# Altium PCB PCB_STC8方案测试板_2022-01-08.pcbdoc
Units mm, origin at the board's own origin, x right, y up, seen from the top; angles counter-clockwise.
Board outline 98 x 98 mm, 2 copper layers (Top Layer, Bottom Layer); 66 components, 57 nets, 261 pads, 56 vias.
Unrouted connection lines stored in the file: 1.
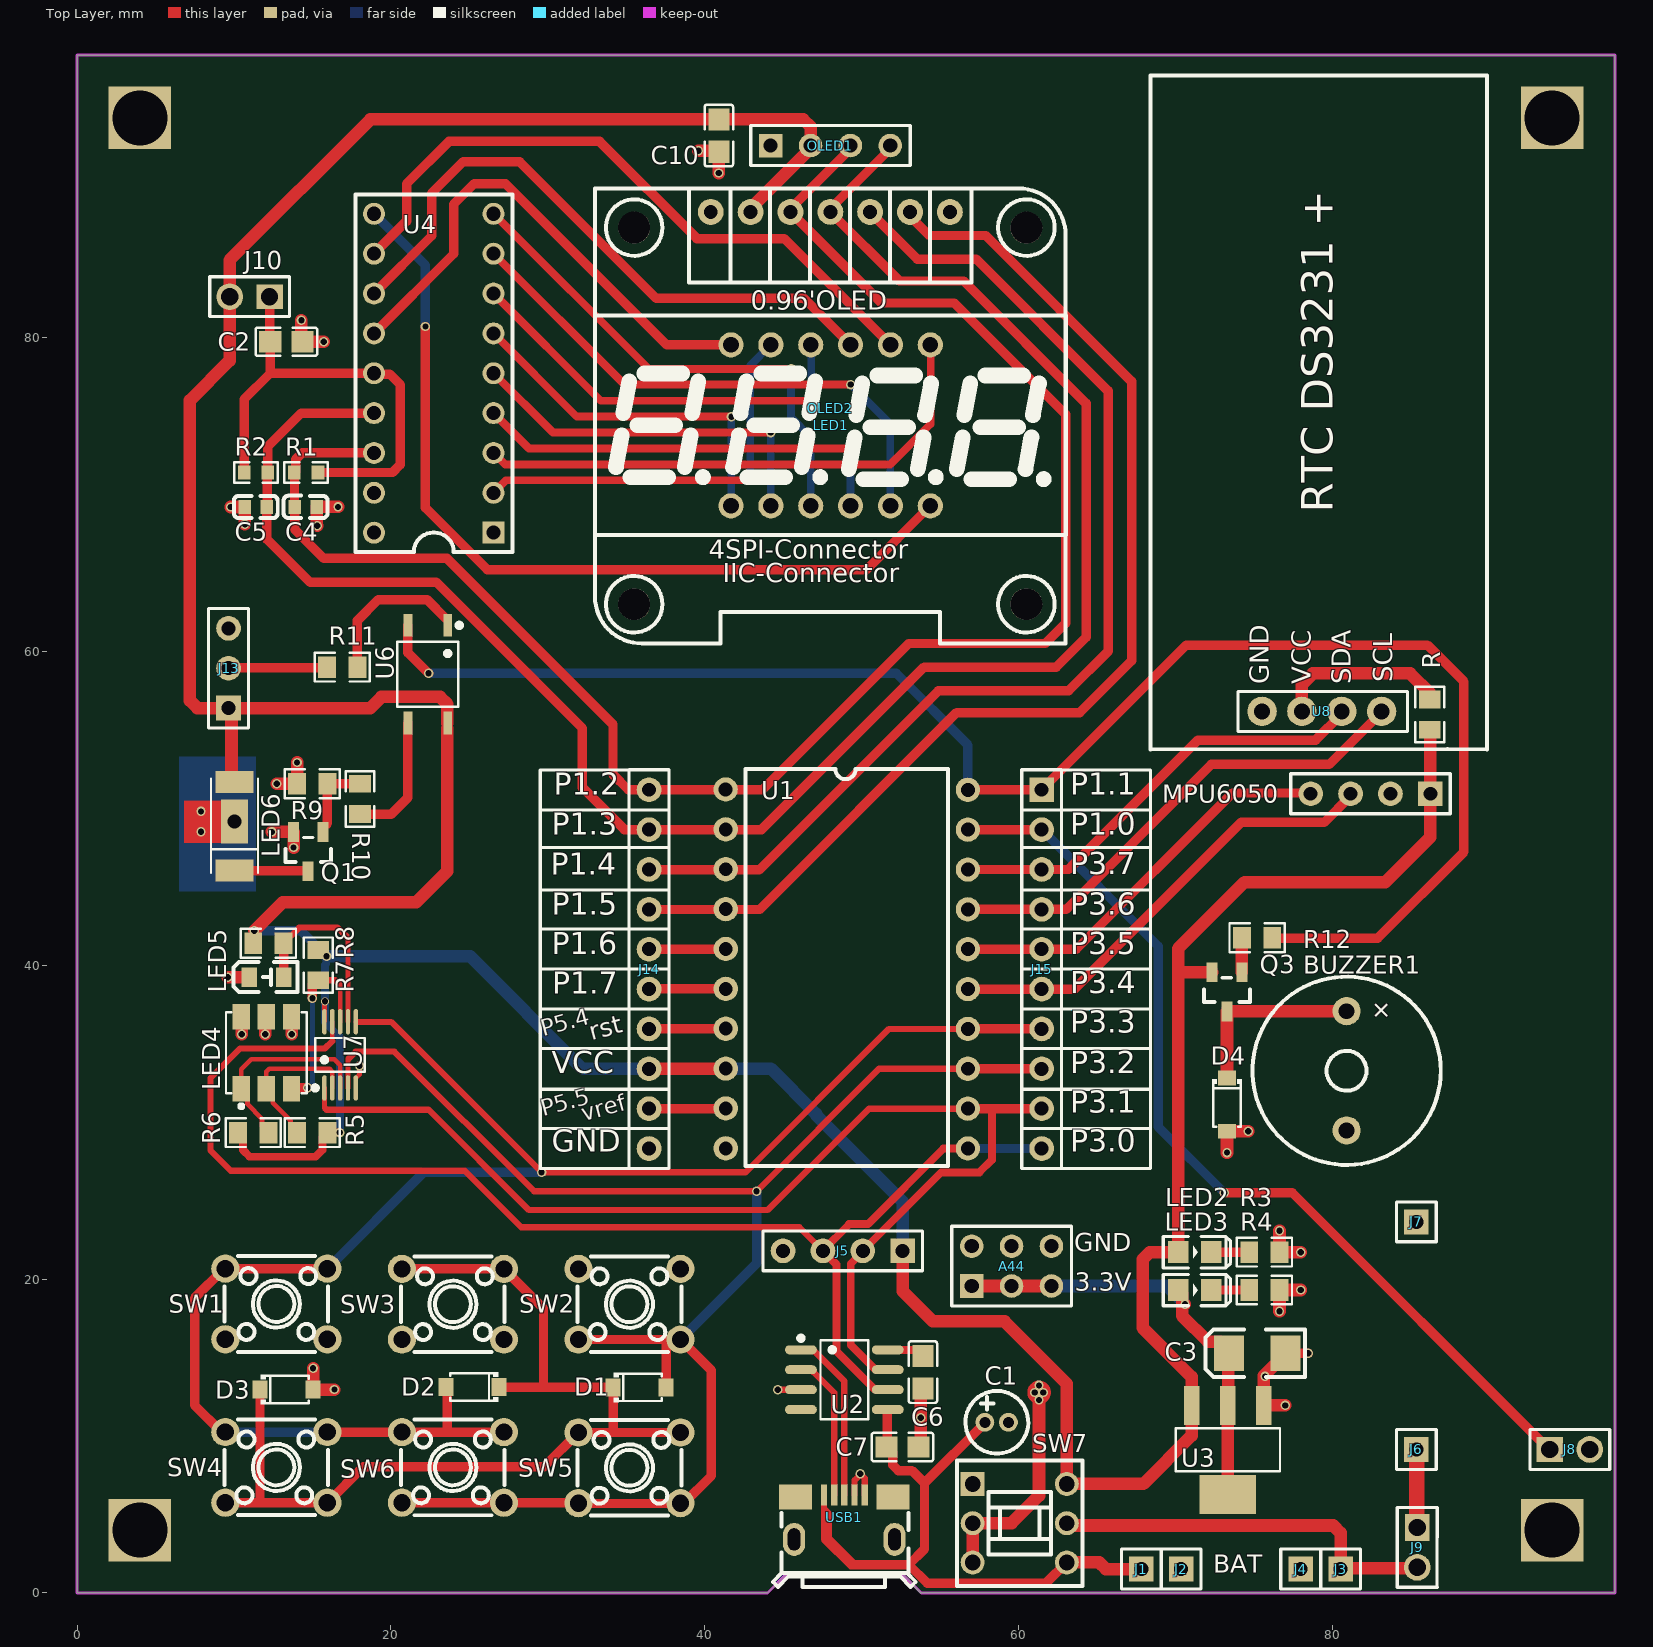
[diagram p0: Top Layer view]
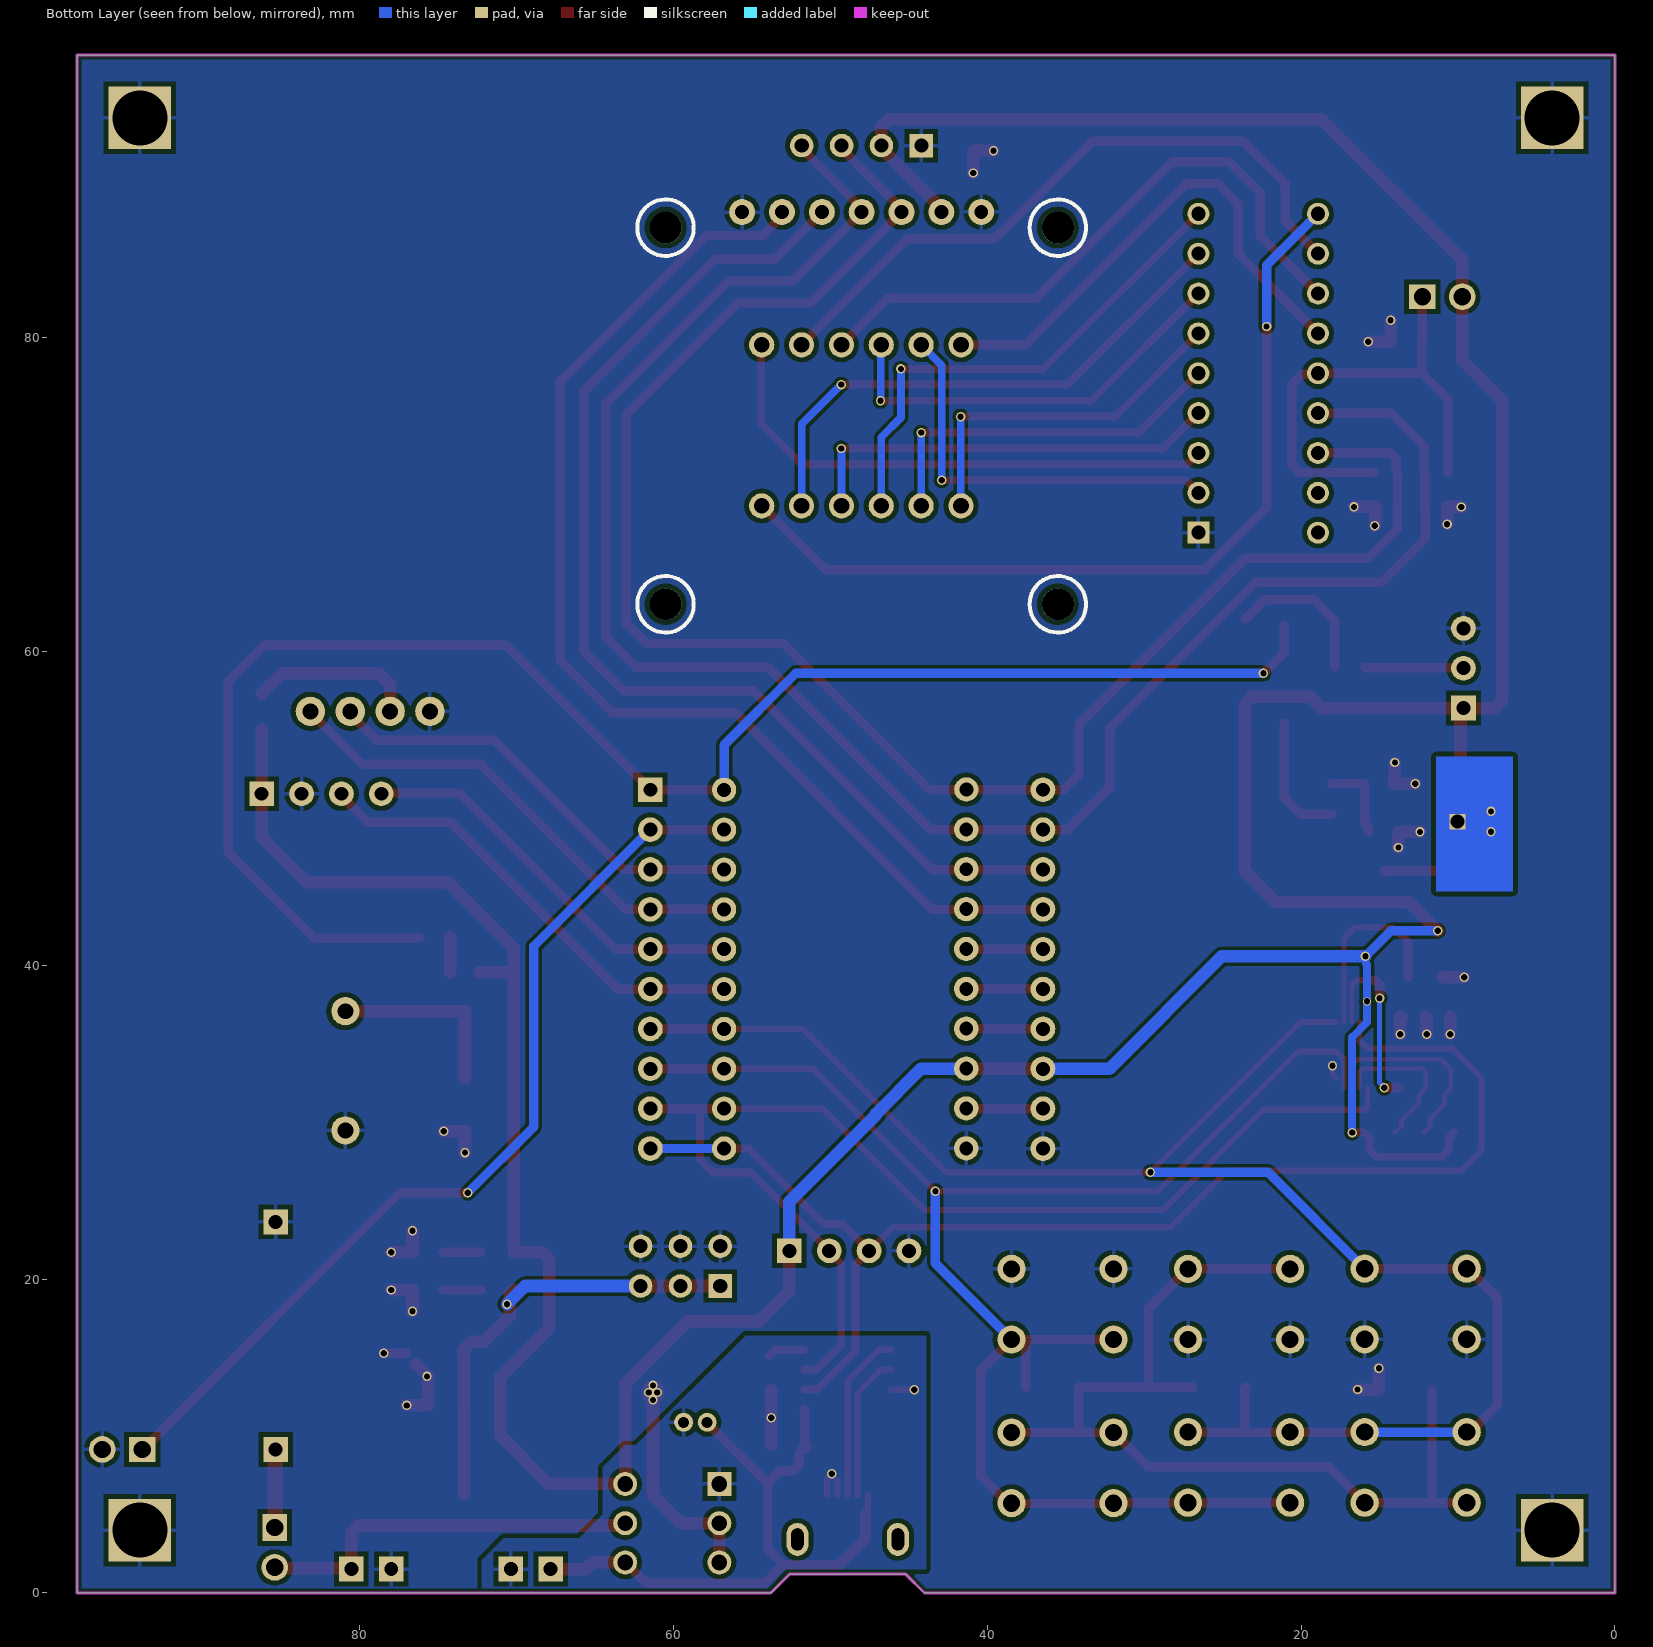
[diagram p1: Bottom Layer view, seen from below]

## Layer stack, top to bottom
Top Solder: solder mask 0.0102, Solder Resist, Dk 3.5
Top Layer: signal copper 0.0356
Dielectric1: dielectric 0.32, FR-4, Dk 4.8
Bottom Layer: signal copper 0.0356
Bottom Solder: solder mask 0.0102, Solder Resist, Dk 3.5

## Board outline
0,0 0,98 98,98 98,0 53.8,0 52.6,1.2 45.2,1.2 44,0

## Design rules (kind name [scope] priority, off if disabled: settings)
AssemblyTestPointUsage [All] p1 off:
AssemblyTestpoint [All] p1 off: testpointundercomponent=TRUE minsize=1.016 maxsize=2.54 preferedsize=1.524 minholesize=0 maxholesize=1.016 preferedholesize=0.813 testpointgrid=0.025 usegrid=TRUE gridtolerance=0 allowsidetop=TRUE allowsidebottom=TRUE
Clearance Clearance_1 [All] p1: gap=0.2 ignorepadtopadclearanceinfootprint=TRUE except(0.3: THPad-THPad THPad-Via THPad-Fill THPad-Poly THPad-Region THPad-Text THPad-Hole Fill-Fill Fill-Poly Fill-Region Fill-Text Fill-Hole Poly-Poly Poly-Region Poly-Text Poly-Hole Region-Region Region-Text Region-Hole)
ComponentClearance [All] p1 off: gap=0.254 collisioncheckmode=3 verticalgap=0.254 showdistances=FALSE
DiffPairsRouting [All] p1 off: maxlimit=0.254 minlimit=0.254 mostfreqgap=0.254 toplayer_minwidth=0.381 toplayer_maxwidth=0.381 toplayer_prefwidth=0.381 bottomlayer_minwidth=0.381 bottomlayer_maxwidth=0.381 bottomlayer_prefwidth=0.381 maxuncoupledlength=12.7
FabricationTestPointUsage [All] p1 off: valid=0 allowmultiple=FALSE
FabricationTestpoint [All] p1 off: side=3 testpointundercomponent=TRUE minsize=1.016 maxsize=2.54 preferedsize=1.524 minholesize=0 maxholesize=1.016 preferedholesize=0.813 testpointgrid=0.025 allowsidetop=TRUE allowsidebottom=TRUE usegrid=TRUE gridtolerance=0
FanoutControl Fanout_BGA [IsBGA] p1 off: bgadir=Out bgaviamode=Centered fanoutstyle=Auto fanoutdirection=Alternating viagrid=0.025 // Fanout_BGA (Default Rule)
FanoutControl Fanout_LCC [IsLCC] p2 off: bgadir=Out bgaviamode=Centered fanoutstyle=Auto fanoutdirection=Alternating viagrid=0.025 // Fanout_LCC (Default Rule)
FanoutControl Fanout_SOIC [IsSOIC] p3 off: bgadir=Out bgaviamode=Centered fanoutstyle=Auto fanoutdirection=Alternating viagrid=0.025 // Fanout_SOIC (Default Rule)
FanoutControl Fanout_Small [(CompPinCount < 5)] p4 off: bgadir=Out bgaviamode=Centered fanoutstyle=Auto fanoutdirection=OutThenIn viagrid=0.025 // Fanout_Small (Default Rule)
FanoutControl Fanout_Default [All] p5 off: bgadir=Out bgaviamode=Centered fanoutstyle=Auto fanoutdirection=Alternating viagrid=0.025 // Fanout_Default (Default Rule)
Height [All] p1 off: minheight=0 maxheight=25.4 prefheight=12.7
HoleSize [All] p1 off: absolutevalues=TRUE maxlimit=2.54 minlimit=0.025 maxpercent=80.000 minpercent=20.000
HoleToHoleClearance [All] p1 off: gap=0.254 allowstackedmicrovias=TRUE
LayerPairs [All] p1 off: enforce=TRUE
MinimumSolderMaskSliver [All] p1 off: minsoldermaskwidth=0.254
NetAntennae [All] p1 off: netantennaetolerance=0
PasteMaskExpansion [All] p1 off: expansion=0
PlaneClearance [All] p1 off: clearance=0.508
PlaneConnect [All] p1 off: planeconnectstyle=Relief reliefexpansion=0.508 reliefentries=4 reliefconductorwidth=0.254 reliefairgap=0.254
PolygonConnect [All] p1: thpad.connectstyle=Relief thpad.reliefconductorwidth=0.254 thpad.reliefentries=4 thpad.polygonreliefangle="90 Angle" thpad.airgapwidth=0.3 smdpad.connectstyle=Relief smdpad.reliefconductorwidth=0.254 smdpad.reliefentries=4 smdpad.polygonreliefangle="90 Angle" smdpad.airgapwidth=0.3 via.connectstyle=Direct via.reliefconductorwidth=0.254 via.reliefentries=4 via.polygonreliefangle="90 Angle" via.airgapwidth=0.3
RoutingCorners [All] p1 off: cornerstyle=45-Degree minsetback=2.54 maxsetback=2.54
RoutingLayers [All] p1 off: top layer_v5=TRUE bottom layer_v5=TRUE
RoutingPriority [All] p1 off: routingpriority=0
RoutingTopology [All] p1 off: topology=Shortest
RoutingVias [All] p1: holewidth=0.4 width=0.6 viastyle="Through Hole" minholewidth=0.4 minwidth=0.6 maxholewidth=0.4 maxwidth=0.6
ShortCircuit [All] p1 off: allowed=FALSE
SilkToSilkClearance [All] p1 off: silktosilkclearance=0.254
SilkToSolderMaskClearance [IsPad] p1 off: minsilkscreentomaskgap=0.254 clearancetoexposedcopper=TRUE
SolderMaskExpansion [All] p1 off: expansion=0.102 istentingtop=FALSE
UnRoutedNet [All] p1 off:
UnpouredPolygon [All] p1 off:
Width [All] p1: maxlimit=2.54 minlimit=2539.975 preferedwidth=0.508 toplayer_minwidth=0 bottomlayer_minwidth=0 minimp=50.000000 maximp=50.000000 favimp=50.000000
1 further rules are at their usual default settings.

## Components (designator, comment, footprint, x,y, rotation, side; value= is the part's Value field where it differs from the comment)
A44 "Comment" HDR2X3 57.01,19.56 r0 top
BUZZER1 "TMB12A05" BUZ-TH_BD12.0-P7.60-D0.6-FD 80.899,33.274 r270 top
C1 "10u" ?#1 58.6,10.875 r0 top
C2 "104" C0805 13.34,79.73 r180 top
C3 "10uF" "CD B(3528)" 75.2,15.275 r0 top
C4 "101" C0603 14.57,69.204 r0 top
C5 "101" C0603 11.4,69.2 r0 top
C6 "104" C0805 53.9,14.07 r270 top
C7 "104" C0805 52.6,9.3 r180 top
C10 "0.1u" C0805 40.9,92.87 r90 top
D1 "1N4148W-T4" SOD-123_L2.8-W1.8-LS3.7-RD 35.85,13.1 r0 top
D2 "1N4148W-T4" SOD-123_L2.8-W1.8-LS3.7-RD 25.2,13.125 r180 top
D3 "1N4148W-T4" SOD-123_L2.8-W1.8-LS3.7-RD 13.35,12.963 r0 top
D4 "1N4148W-T4" SOD-123_L2.8-W1.8-LS3.7-RD 73.279,31.115 r270 top
J1 "充电+" HDR-M-2.54_1X1 67.818,1.524 r270 top
J2 "充电-" HDR-M-2.54_1X1 70.358,1.524 r270 top
J3 "锂电池供电+" HDR-M-2.54_1X1 80.518,1.524 r270 top
J4 "锂电池供电-" HDR-M-2.54_1X1 77.978,1.524 r270 top
J5 "HDR-M-2.54_1x4" HDR-M-2.54_1X4 48.8,21.8 r180 top
J6 "led驱动+" HDR-M-2.54_1X1 85.344,9.144 r90 top
J7 "led驱动-" HDR-M-2.54_1X1 85.344,23.644 r90 top
J8 "PWM输入" HDR-M-2.54_1X2 95.123,9.144 r0 top
J9 "led驱动+" HDR-M-2.54_1X2 85.4,2.9 r270 top
J10 "HDR-M-2.54_1x2" HDR-M-2.54_1X2 11,82.6 r180 top
J13 "HDR-M-2.54_1x3" HDR-M-2.54_1X3 9.652,58.928 r90 top
J14 "HDR-M-2.54_1x10" HDR-M-2.54_1X10#1 36.449,39.751 r270 top
J15 "HDR-M-2.54_1x10" HDR-M-2.54_1X10#2 61.468,39.751 r270 top
LED1 "SR410361N" LED-SEG-TH_12P-L30.0-W14.0-P2.54-S10.26-BL 48.022,74.404 r0 top
LED2 "LED-0805_G" LED0805_GREEN 71.213,21.717 r0 top
LED3 "LED-0805_G" LED0805_GREEN 71.213,19.304 r0 top
LED4 "5050-RGB" LED-ARRAY-SMD_6P-L5.4-W5.0-TL-FD 12.065,34.417 r90 top
LED5 "0805Y" LED0805-RD_YELLOW 12.065,39.243 r0 top
LED6 "HL-A-5730D34W_C210350" LED-SMD_3P-L5.7-W3.0-RD 10.033,48.849 r90 top
MPU6050 "MCU6050" HDR-M-2.54_1X4 82.423,50.927 r180 top (schematic designator J12)
OLED1 "0.96OLED_4P" HDR1X4 44.2,92.234 r0 top
OLED2 "0.96OLED_7P" 0.96OLED_7P 48,88 r0 top
Q1 "s8050" SOT-23-3_L2.9-W1.3-P1.90-LS2.4-TR 14.732,47.244 r90 top
Q3 "s8550" SOT-23-3_L2.9-W1.6-P1.90-LS2.8-TR-CW 73.275,38.3 r90 top
R "2k" R0805 86.2,55.975 r270 top (schematic designator R12)
R1 "10k" R0603 14.6,71.4 r0 top
R2 "10k" R0603 11.4,71.4 r180 top
R3 "1k" R0805 75.658,21.717 r0 top
R4 "680" R0805 75.658,19.304 r0 top
R5 "1k" R0805 14.986,29.337 r180 top
R6 "1k" R0805 11.226,29.337 r180 top
R7 "1k" R0805 15.367,40.005 r90 top
R8 "1k" R0805 12.192,41.402 r180 top
R9 "47k" R0805 14.986,51.562 r0 top
R10 "4k7" R0805 18.034,50.596 r90 top
R11 "1k" R0805 16.9,59 r180 top
R12 "2k" R0805 75.2,41.75 r180 top
SW1 "K2-1102DP-C4SW-04" KEY-TH_4P-L6.0-W6.0-P4.50-LS6.5 12.7,18.415 r180 top
SW2 "K2-1102DP-C4SW-04" KEY-TH_4P-L6.0-W6.0-P4.50-LS6.5 35.201,18.4 r0 top
SW3 "K2-1102DP-C4SW-04" KEY-TH_4P-L6.0-W6.0-P4.50-LS6.5 23.951,18.4 r180 top
SW4 "K2-1102DP-C4SW-04" KEY-TH_4P-L6.0-W6.0-P4.50-LS6.5 12.7,8.001 r0 top
SW5 "K2-1102DP-C4SW-04" KEY-TH_4P-L6.0-W6.0-P4.50-LS6.5 35.201,7.975 r180 top
SW6 "K2-1102DP-C4SW-04" KEY-TH_4P-L6.0-W6.0-P4.50-LS6.5 23.951,8 r0 top
SW7 "电源开关" SW-TH_6P-L8.0-W8.0-P2.50 60.071,4.445 r270 top
U1 "STC8G1K17-38I-TSSOP20" DIP-20-wide 41.332,51.199 r0 top
U2 "CH340N" SOP-8_L5.0-W4.0-P1.27-LS6.0-BL 48.895,13.589 r270 top
U3 "AMS1117-3.3" SOT-223-4_L6.5-W3.5-P2.30-LS7.0-BR 73.331,9.117 r90 top
U4 "TM1636" DIP18-2.54-22.8X7.62MM 22.733,77.724 r90 top
U6 "TLP184(GB-TPL,SE(T" SOP-4_L3.7-W4.6-P2.54-LS7.0-BR 22.352,58.547 r90 top
U7 "CH442E" MSOP-10_L3.0-W3.0-P0.50-LS5.0-BL 16.764,34.29 r0 top
U8 "DS3231模块" ?#2 78.812,73.955 r90 top (schematic designator U5)
USB1 "U254-051T-4BH82-S2S" MICRO-USB-SMD_U254-051T-4BH82-S2S 48.895,4.826 r0 top

## Footprints (in the part's own frame and the unit in brackets; to place one, negate y for a bottom-side part, rotate by r counter-clockwise, add the part's x,y. Pads: shape width x height; smd on the part's side, far side on the other; paste and mask are expansions set on the pad)
0.96OLED_7P [mm]
  round 1.65 hole 0.89: 1(-7.619,0.001) 2(-5.079,-0.004) 3(-2.539,-0.004) 4(0.001,0.004) 5(2.539,-0.001) 6(5.079,-0.001) 7(7.619,-0.004)
  round 2.032 hole 2.032 unplated: ""(-12.501,-24.997) ""(-12.501,-0.997) ""(12.498,-24.997) ""(12.498,-0.997)
  silkscreen extent -15,-27.5 15,1.5
BUZ-TH_BD12.0-P7.60-D0.6-FD [mm]
  round 1.8 hole 1: 1(-3.8,0) 2(3.8,0)
  silkscreen extent -6,-6 6,6
C0603 [mm]
  rect 0.8x0.9 smd: 1(-0.7,0) 2(0.7,0)
  silkscreen extent -1.41,-0.71 1.39,0.72
C0805 [mm]
  rect 1.41x1.35 smd: 1(-1.03,0) 2(1.03,0)
  silkscreen extent -1.96,-0.9 1.96,0.9
"CD B(3528)" [mil] "长3.5mm，宽2.8mm，厚1.9mm"
  rect 75x90 smd: 1(-70.87,-0.01) 2(70.86,-0.01)
  silkscreen extent -130,-60 120,60, body extent -69,-55 69,55, height 75
DIP18-2.54-22.8X7.62MM [mm]
  rect 1.4x1.4 hole 0.899: 1(-10.16,-3.81)
  round 1.4 hole 0.899: 2(-7.62,-3.81) 3(-5.08,-3.81) 4(-2.54,-3.81) 5(0,-3.81) 6(2.54,-3.81) 7(5.08,-3.81) 8(7.62,-3.81) 9(10.16,-3.81) 10(10.16,3.81) 11(7.62,3.81) 12(5.08,3.81) 13(2.54,3.81) 14(0,3.81) 15(-2.54,3.81) 16(-5.08,3.81) 17(-7.62,3.81) 18(-10.16,3.81)
  silkscreen extent -11.38,-5 11.38,5
DIP-20-wide [mil] "STC8G1K17-38I-TSSOP20"
  round 61 hole 35: 1(0,0) 2(0.25,-100.02) 3(0.25,-200.04) 4(0.25,-300.06) 5(0.25,-400.08) 6(0.25,-500.1) 7(0.25,-600.12) 8(0.25,-700.14) 9(0.25,-800.16) 10(0.25,-900.18) 11(607.75,-900.59) 12(607.75,-800.62) 13(607.75,-700.64) 14(607.75,-600.66) 15(607.75,-500.68) 16(607.75,-400.7) 17(607.75,-300.73) 18(607.75,-200.75) 19(607.75,-100.77) 20(607.75,-0.79)
  silkscreen extent 50,-945 558,51
HDR1X4 [mm] "Connector; Header; 4 Position"
  rect 1.5x1.5 hole 0.9: 1(0,0)
  round 1.5 hole 0.9: 2(2.54,0) 3(5.08,0) 4(7.62,0)
  silkscreen extent -1.27,-1.27 8.89,1.27
HDR2X3 [mm] "Connector; Header; 3x2 Position"
  rect 1.5x1.5 hole 0.9: 1(0,0)
  round 1.5 hole 0.9: 2(0,2.54) 3(2.54,0) 4(2.54,2.54) 5(5.08,0) 6(5.08,2.54)
  silkscreen extent -1.27,-1.27 6.35,3.81, body extent -1.27,-1.27 6.35,3.81, height 8.54
HDR-M-2.54_1X1 [mil]
  rect 62x62 hole 35: 1(0,0)
  silkscreen extent -50,-50 50,50
HDR-M-2.54_1X2 [mm]
  rect 1.7x1.575 hole 1.1: 1(-1.27,0)
  round 1.7 hole 1.1: 2(1.27,0)
  silkscreen extent -2.54,-1.27 2.54,1.27
HDR-M-2.54_1X3 [mil]
  rect 62x62 hole 35: 1(-100,0)
  round 62 hole 35: 2(0,0) 3(100,0)
  silkscreen extent -150,-50 150,50
HDR-M-2.54_1X4 [mil]
  rect 62x62 hole 35: 1(-150,0)
  round 62 hole 35: 2(-50,0) 3(50,0) 4(150,0)
  silkscreen extent -200,-50 200,50
HDR-M-2.54_1X10#1 [mil]
  round 62 hole 35: 1(-450,0) 2(-350,0) 3(-250,0) 4(-150,0) 5(-50,0) 6(50,0) 7(150,0) 8(250,0) 9(350,0) 10(450,0)
  silkscreen extent -500,-50 500,50
HDR-M-2.54_1X10#2 [mil]
  rect 62x62 hole 35: 1(-450,0)
  round 62 hole 35: 2(-350,0) 3(-250,0) 4(-150,0) 5(-50,0) 6(50,0) 7(150,0) 8(250,0) 9(350,0) 10(450,0)
  silkscreen extent -500,-50 500,50
KEY-TH_4P-L6.0-W6.0-P4.50-LS6.5 [mm]
  round 1.8 hole 1.1: 1(-3.251,-2.25) 2(3.251,-2.25) 3(3.251,2.25) 4(-3.251,2.25)
  silkscreen extent -3.3,-3.05 3.3,3.05
LED0805-RD_YELLOW [mm]
  rect 1x1.25 smd: 1(-1.1,0) 2(1.1,0)
  silkscreen extent -2.1,-0.95 1.98,0.96
LED0805_GREEN [mm]
  rect 1.3x1.4 smd: 1(-1.05,0) 2(1.05,0)
  silkscreen extent -2,-1 2.3,1
LED-ARRAY-SMD_6P-L5.4-W5.0-TL-FD [mm]
  rect 1.625x1.1 smd: 1(-2.287,1.6) 2(-2.287,0) 3(-2.287,-1.6) 4(2.287,-1.6) 5(2.287,0) 6(2.287,1.6)
  silkscreen extent -3.52,-2.58 2.58,2.58
LED-SEG-TH_12P-L30.0-W14.0-P2.54-S10.26-BL [mm]
  round 1.6 hole 1: 1(-6.35,-5.13) 2(-3.81,-5.13) 3(-1.27,-5.13) 4(1.27,-5.13) 5(3.81,-5.13) 6(6.35,-5.13) 7(6.35,5.13) 8(3.81,5.13) 9(1.27,5.13) 10(-1.27,5.13) 11(-3.81,5.13) 12(-6.35,5.13)
  silkscreen extent -15,-7 15,7
LED-SMD_3P-L5.7-W3.0-RD [mm]
  rect 1.4x2.4 smd: 1(-2.82,0) 2(2.82,0)
  rect 2.8x1.7 smd: 3(0.3,0)
  silkscreen extent -2.96,-1.5 3.04,1.5
MICRO-USB-SMD_U254-051T-4BH82-S2S [mm]
  rect 0.4x1.35 smd: 1(-1.3,1.413) 2(-0.65,1.413) 3(0,1.413) 4(0.65,1.413) 5(1.3,1.413)
  rect 2.1x1.6 smd: 6(3.1,1.288) 9(-3.1,1.288)
  oval 1.4x2.1 hole 0.8 slot 1.4 at 90 deg: 7(3.2,-1.412) 8(-3.2,-1.412)
  silkscreen extent -4.55,-4.44 4.55,0.26
MSOP-10_L3.0-W3.0-P0.50-LS5.0-BL [mm]
  oval 0.28x1.62 smd: 1(-1,-2.11) 2(-0.5,-2.11) 3(0,-2.11) 4(0.5,-2.11) 5(1,-2.11) 6(1,2.11) 7(0.5,2.11) 8(0,2.11) 9(-0.5,2.11) 10(-1,2.11)
  silkscreen extent -1.74,-2.26 1.58,1.07
R0603 [mm]
  rect 0.806x0.864 smd: 1(-0.753,0) 2(0.753,0)
  silkscreen extent -1.39,-0.66 1.39,0.66
R0805 [mm]
  rect 1.133x1.377 smd: 1(-0.966,0) 2(0.966,0)
  silkscreen extent -1.76,-0.92 1.76,0.92
SOD-123_L2.8-W1.8-LS3.7-RD [mm]
  rect 0.95x1.15 smd: 1(-1.693,0) 2(1.693,0)
  silkscreen extent -1.63,-0.94 1.41,0.94
SOP-4_L3.7-W4.6-P2.54-LS7.0-BR [mm]
  rect 1.447x0.56 smd: 1(3.11,-1.27) 3(3.11,1.27) 4(-3.11,1.27) 6(-3.11,-1.27)
  silkscreen extent -2.07,-2.15 3.26,1.95
SOP-8_L5.0-W4.0-P1.27-LS6.0-BL [mm]
  oval 0.574x2.036 smd: 1(-1.905,-2.768) 2(-0.635,-2.768) 3(0.635,-2.768) 4(1.905,-2.768) 5(1.905,2.768) 6(0.635,2.768) 7(-0.635,2.768) 8(-1.905,2.768)
  silkscreen extent -2.79,-2.92 2.53,1.52
SOT-23-3_L2.9-W1.3-P1.90-LS2.4-TR [mm]
  rect 1.25x0.7 smd: 1(1.25,0.95) 2(1.25,-0.95) 3(-1.25,0)
  silkscreen extent -0.65,-1.46 0.9,1.46
SOT-23-3_L2.9-W1.6-P1.90-LS2.8-TR-CW [mm]
  rect 1.25x0.7 smd: 1(1.25,0.95) 2(1.25,-0.95) 3(-1.25,0)
  silkscreen extent -0.65,-1.46 0.9,1.46
SOT-223-4_L6.5-W3.5-P2.30-LS7.0-BR [mm]
  rect 2.47x0.98 smd: 1(2.835,-2.3) 2(2.835,0) 3(2.835,2.3)
  rect 2.47x3.6 smd: 4(-2.835,0)
  silkscreen extent -1.37,-3.33 1.37,3.33
SW-TH_6P-L8.0-W8.0-P2.50 [mm]
  rect 1.524x1.524 hole 1: 1(-2.5,-3)
  round 1.524 hole 1: 2(0,-3) 3(2.5,-3) 4(-2.5,3) 5(0,3) 6(2.5,3)
  silkscreen extent -4,-4 4,4
?#1 [mm]
  round 1.2 hole 0.7: 1(-0.751,0) 2(0.751,0)
  silkscreen extent -1.98,-2 2.01,2
?#2 [mm] "Connector; Header; 4 Position"
  round 1.88 hole 1.016: 1(-17.78,-4.318) 2(-17.78,-1.778) 3(-17.78,0.762) 4(-17.78,3.302)
  silkscreen extent -20.19,-11.05 22.73,10.41

## Free pads (board coordinates)
  rect 4x4 hole 3.5: ""(4,4) ""(4,94) ""(94,4) ""(94,94)
  rect 1x1 hole 0.9: ""(10.033,49.149)

## Via types
v1: diameter 0.6, hole 0.4, Top Layer to Bottom Layer, 55 vias
v2: diameter 0.5, hole 0.4, Top Layer to Bottom Layer, 1 vias

## Nets (pads, with @x,y where several pads share a name; then routed paths per layer and width w, separated by ;. In a path a pad name is that pad's centre, name@x,y a point inside that pad or via, vN(x,y) a via of type N, cw(c..) or ccw(c..) an arc to the next point about the centre after c; other vN are vias at no path point)
3.3V: A44.1 A44.3 A44.5 C3.1 LED3.1 U3.2 U3.4 | length 29.1
  Top Layer w0.8: A44.1 A44.5 ; LED3.1 70.413,19.054 v1@70.413,18.4 ; v1(70.6,18.4) v1@70.413,18.4 ; U3.4 U3.2 73.365,11.986 73.365,15.24 C3.1 73.4,15.465 72.847,16.018 72.057,16.018 70.413,17.662 v1@70.413,18.4
  Bottom Layer w0.8: A44.5 69.44,19.56 v1(70.6,18.4)
5V: J3.1 J9.2 SW7.5 | length 24.9
  Top Layer w0.8: SW7.5 63.267,4.445 63.412,4.3 80.049,4.3 80.518,3.831 J3.1 ; J3.1@80.571,1.577 85.347,1.577 J9.2
6050_SCL: J15.6 MPU6050.3 U1.15 | length 29.5
  Top Layer w0.6: U1.15 J15.6 63.556,38.481 74.175,49.1 79.475,49.1 MPU6050.3@81.153,50.778
6050_SDA: J15.5 MPU6050.4 U1.16 | length 26
  Top Layer w0.6: U1.16 J15.5 63.671,41.021 73.625,50.975 MPU6050.4@78.661,50.975
A: LED1.11 U4.2 | length 25.9
  Top Layer w0.5: U4.2 27.339,70.9 v1(42.9,70.9)
  Bottom Layer w0.5: v1(42.9,70.9) 42.9,78.222 LED1.11
B: LED1.7 U4.3 | length 34.3
  Top Layer w0.5: U4.3 26.556,72.644 27.286,71.914 51.814,71.914 54.4,74.5 54.4,79.506 LED1.7
BGND: C1.2 C6.2 C7.1 J2.1 SW7.1 U2.3 USB1.4 USB1.5 | length 8.4
  Top Layer w0.4: v1(44.646,12.954) U2.3 ; USB1.4 49.545,7.191 49.9,7.546 v1(49.9,7.6) 50.195,7.305 USB1.5
  Top Layer w0.5: C7.1 C7.1@53.765,9.435 ; C6.2@53.765,12.905 C6.2
  Top Layer w0.8: C7.1@53.765,9.435 C6.2@53.765,12.905
  Bottom Layer w0.4: v1@44.6,13 v1(44.646,12.954)
  other v1: 53.765,11.17
BUZZER1_1: BUZZER1.1 D4.1 Q3.3 | length 11.9
  Top Layer w0.8: D4.1 73.277,32.81 73.277,37.048 Q3.3 73.287,37.062 80.887,37.062 BUZZER1.1
C: LED1.4 U4.4 | length 27.4
  Top Layer w0.5: U4.4 28.798,72.929 v1(49.3,72.929)
  Bottom Layer w0.5: LED1.4 49.3,69.282 49.296,69.286 49.296,72.925 v1(49.3,72.929)
C2_2: C2.2 J10.1 R1.2 R2.2 U4.14 | length 31
  Top Layer w0.6: R2.2 10.647,76.061 12.31,77.724 ; J10.1 12.29,82.58 12.29,79.75 C2.2 12.31,77.724 ; R1.2 20.1,71.4 20.6,71.9 20.6,77 19.931,77.669 18.978,77.669 U4.14 12.31,77.724
D: LED1.2 U4.5 | length 23.9
  Top Layer w0.5: U4.5 30.324,73.943 v1(44.2,73.943)
  Bottom Layer w0.5: v1(44.2,73.943) 44.206,73.937 44.206,69.292 44.2,69.286 LED1.2
D+: U2.1 USB1.3 | length 10.9
  Top Layer w0.4: U2.1 46.905,15.494 46.992,15.407 48.895,13.505 USB1.3
D-: U2.2 USB1.2 | length 9.3
  Top Layer w0.4: U2.2 46.811,14.224 46.945,14.09 46.945,14.055 48.245,12.755 USB1.2
DP: LED1.3 U4.9 | length 32.3
  Top Layer w0.5: U4.9 36.427,78 v1(45.5,78)
  Bottom Layer w0.5: v1(45.5,78) 45.5,74.9 46.752,73.648 46.752,69.37 46.8,69.322 LED1.3
E: LED1.1 U4.6 | length 23.1
  Top Layer w0.5: U4.6 31.85,74.957 v1(41.7,74.957)
  Bottom Layer w0.5: LED1.1 41.7,69.302 41.686,69.316 41.686,74.943 v1(41.7,74.957)
F: LED1.10 U4.7 | length 26.7
  Top Layer w0.5: U4.7 33.376,75.971 v1(46.8,75.971)
  Bottom Layer w0.5: LED1.10 46.8,79.486 46.781,79.467 46.781,75.991 v1(46.8,75.971)
G: LED1.5 U4.8 | length 35
  Top Layer w0.5: U4.8 34.887,77 v1(49.3,77)
  Bottom Layer w0.5: v1(49.3,77) 51.816,74.484 51.816,69.322 51.8,69.306 LED1.5
G1: LED1.12 U4.13 | length 32.8
  Top Layer w0.6: U4.13 24,85.341 24,88.5 25.3,89.8 27.3,89.8 37.566,79.534 LED1.12
G2: LED1.9 U4.12 | length 40.3
  Top Layer w0.6: U4.12 22.6,86.481 22.6,89.2 24.6,91.2 28.2,91.2 36.9,82.5 46.326,82.5 LED1.9
G3: LED1.8 U4.11 | length 42.6
  Top Layer w0.6: U4.11 21,87.421 21,89.8 23.7,92.5 33.3,92.5 39.5,86.3 45.066,86.3 LED1.8
G4: LED1.6 U4.10 | length 55.6
  Top Layer w0.6: v1(22.2,80.7) 22.2,69.15 26.15,65.2 50.298,65.2 LED1.6
  Bottom Layer w0.6: U4.10 22.2,84.607 v1(22.2,80.7)
GND: A44.2 A44.4 A44.6 BUZZER1.2 C2.1 C3.2 C4.2 C5.1 C10.1 D3.2 D4.2 J4.1 J5.4 J7.1 J8.2 J13.3 J14.10 LED4.4 LED4.5 LED4.6 LED5.1 MPU6050.2 OLED1.1 OLED2.1 OLED2.7 pad.@4,4 pad.@4,94 pad.@94,4 pad.@94,94 Q1.1 R3.2 R4.2 R9.1 SW1.3 SW1.4 SW2.3 SW2.4 SW3.3 SW3.4 SW7.2 SW7.3 U1.10 U3.1 U4.1 U7.5 U8.4 | length 52.6
  Top Layer w0.3: U7.5@17.776,32.815 18,33.039 v1(18,33.6)
  Top Layer w0.6: C3.2 v1(78.45,15.275)
  Top Layer w0.8: v1(9.606,39.243) LED5.1 ; v1(9.8,69.2) C5.1 v1(10.7,68.1) ; LED4.6 10.5,36.67 v1(10.5,35.6) ; v1(12,35.6) 12,36.639 LED4.5 ; v1(12.423,48.494) Q1.1 13.8,48.476 v1(13.8,47.5) ; v1(12.732,51.567) R9.1@14.02,51.567 ; LED4.4 13.6,36.64 13.675,36.565 v1(13.675,35.6) ; R9.1 R9.1@14.02,51.567 ; v1(14.02,52.921) R9.1@14.02,51.567 ; R9.1@14.091,51.567 R9.1@14.02,51.567 ; v1(14.3,81.1) 14.3,79.8 C2.1 v1(15.729,79.73) ; v1(15.043,14.322) D3.2 v1(16.402,12.963) ; v1(15.3,68) 15.27,68.03 C4.2 v1(16.629,69.204) ; v1(39.6,91.9) 40.84,91.9 C10.1 v1(40.9,90.481) ; SW7.3 SW7.2 59.545,4.445 61.3,6.2 v1(61.3,12.3) ; v1(73.279,28.063) D4.2 v1(74.638,29.422) ; C3.2@76.447,14.532 76.31,14.532 75.633,13.855 75.633,11.954 U3.1 v1(76.99,11.952) ; v1(76.624,17.945) R4.2 v1(77.983,19.304) ; v1(76.624,23.076) R3.2 v1(77.983,21.717)
  Top Layer w1: v1@61.55,12.775 ccw(c61.3,12.775) v1@61.55,12.775
  other v1: 61.025,12.775 61.575,12.775 61.3,13.225 75.7,13.8
J9_1: J6.1 J9.1 | length 5
  Top Layer w1: J6.1 85.372,9.116 85.372,4.198 J9.1
J13_2: J13.2 R11.2 | length 6.3
  Top Layer w0.6: J13.2 9.688,58.964 15.898,58.964 R11.2
KEY0: D1.2 J15.8 SW2.1 SW2.2 SW5.3 SW5.4 SW6.1 SW6.2 U1.13 U7.4 | length 104.5
  Top Layer w0.3: U7.4 17.264,34.011 17.3,34.047
  Top Layer w0.4: 17.3,34.047 17.753,34.5 20.225,34.5 29.125,25.6 v1(43.3,25.6) 51.103,33.403 U1.13
  Top Layer w0.6: SW6.1 20.712,5.737 SW6.2@27.202,5.737 ; SW6.2 SW6.2@27.202,5.737 ; SW5.3 SW5.3@31.938,5.737 ; SW2.1 37.525,16.149 ; D1.2 37.543,16.132 37.525,16.149 ; SW5.4 38.477,5.7 SW5.4@38.65,5.7 ; SW2.2@38.5,16.102 SW2.2 ; U1.13@56.77,33.402 J15.8 ; SW6.2@27.202,5.737 SW5.3@31.938,5.737 ; SW5.3@31.938,5.737 31.974,5.7 SW5.4@38.65,5.7 ; 37.525,16.149 SW2.2 ; SW2.2 40.425,14.177 40.425,7.475 SW5.4@38.65,5.7
  Bottom Layer w0.6: SW2.2 43.3,20.997 v1(43.3,25.6)
KEY1: D2.2 J15.7 SW1.1 SW1.2 SW4.3 SW4.4 SW6.3 SW6.4 U1.14 U7.6 | length 107
  Top Layer w0.4: U7.6@17.818,36.388 20.012,36.388 v1(29.6,26.8) 42.6,26.8 51.742,35.942 U1.14
  Top Layer w0.6: SW4.4 9.199,10.251 7.49,11.96 7.49,18.79 9.365,20.665 SW1.2 SW1.1 ; SW4.3 20.699,10.251 SW6.3 ; D2.2 23.582,13.05 23.582,10.275 ; U1.14 J15.7
  Bottom Layer w0.6: SW4.4 SW4.3 ; SW1.1 22.086,26.8 v1(29.6,26.8)
LED2_2: LED2.2 R3.1 | length 2.4
  Top Layer w0.6: LED2.2 R3.1
LED3_2: LED3.2 R4.1 | length 2.4
  Top Layer w0.6: LED3.2 R4.1
LGND: LED6.3 pad.@10.033,49.149
  other v1: 7.9,48.5 7.9,49.8
null: 
OLED_DC: J14.4 OLED2.6 U1.4 | length 73.9
  Top Layer w0.6: J14.4 36.46,43.55 41.311,43.55 U1.4 ; U1.4@41.338,43.55 43.5,43.55 56.05,56.1 63.9,56.1 67.2,59.4 67.2,77.2 57.9,86.5 54.3,86.5 53.079,87.721 OLED2.6
OLED_RES: J14.3 OLED2.5 U1.3 | length 71.5
  Top Layer w0.6: J14.3@36.425,46.075 43.475,46.075 54.885,57.485 63.185,57.485 65.7,60 65.7,76.6 57.3,85 53.537,85 OLED2.5
OLED_SCL: C4.1 J14.1 OLED1.3 OLED2.3 R1.1 U1.1 U4.16 | length 113.8
  Top Layer w0.6: C4.1@13.858,69.292 13.858,71.388 R1.1 13.927,71.481 13.927,72.227 14.344,72.644 U4.16 ; C4.1 13.874,69.2 13.874,67.776 15.725,65.925 23.575,65.925 34.15,55.35 34.15,52.15 35.119,51.181 J14.1 41.332,51.181 43.681,51.181 53,60.5 61.7,60.5 63,61.8 63,75.1 55.9,82.2 51.257,82.2 OLED2.3 45.461,88.206 49.28,92.024 OLED1.3
OLED_SDA: C5.2 J14.2 OLED1.4 OLED2.4 R2.1 U1.2 U4.15 | length 122.8
  Top Layer w0.6: U4.15 14.284,75.184 12.153,73.053 R2.1 12.127,71.373 12.127,69.227 C5.2 12.1,67.15 14.85,64.4 22.9,64.4 32.2,55.1 32.2,51.317 34.876,48.641 J14.2 41.338,48.641 43.616,48.641 53.975,59 62.4,59 64.3,60.9 64.3,75.8 56.5,83.6 52.405,83.6 OLED2.4 48.001,88.21 51.82,92.028 OLED1.4
P1.6: J14.5 U1.5 | length 4.9
  Top Layer w0.6: J14.5 36.457,41.029 41.331,41.029 U1.5
P1.7: J14.6 U1.6 | length 4.9
  Top Layer w0.6: J14.6 36.457,38.489 41.331,38.489 U1.6
P55/VREF: J14.9 U1.9 | length 4.9
  Top Layer w0.6: J14.9 36.456,30.868 41.332,30.868 U1.9
PWM0: J8.1 J15.2 U1.19 | length 60.2
  Top Layer w0.6: U1.19@56.77,48.64 J15.2 ; v1(73.1,25.5) 77.434,25.5 93.79,9.144 J8.1
  Bottom Layer w0.6: J15.2 68.9,41.209 68.9,29.7 v1(73.1,25.5)
PWM1: J15.1 R12.1 U1.20 U6.3 | length 104.5
  Top Layer w0.6: U6.3 21.082,59.918 v1(22.4,58.6) ; U1.20 56.77,51.18 J15.1 70.687,60.4 86.05,60.4 88.375,58.075 88.375,47.225 82.875,41.725 76.433,41.725 76.408,41.75 R12.1
  Bottom Layer w0.6: v1(22.4,58.6) 52.2,58.6 56.769,54.031 U1.20
Q1_2: Q1.2 R9.2 R10.2 | length 5.3
  Top Layer w0.6: Q1.2 15.682,48.769 15.952,49.039 R9.2 R10.2
Q1_3: LED6.1 Q1.3 | length 4.7
  Top Layer w0.6: LED6.1 10.05,46.012 14.715,46.012 Q1.3
R: J5.3 J15.10 U1.11 U2.6 U7.9 | length 83.9
  Top Layer w0.3: 16.264,35.164 U7.9
  Top Layer w0.4: 16.264,35.164 15.8,34.7 10.4,34.7 8.5,32.8 8.5,28.2 9.8,26.9 24.7,26.9 28.3,23.3 46.03,23.3 J5.3 J5.3@47.53,21.83
  Top Layer w0.5: J5.3 48.4,20.93 48.4,15.4 50.832,12.968 51.649,12.968 U2.6 ; J5.3@47.53,21.83 49.2,23.5 50.4,23.5 55.2,28.3 ; 55.2,28.324 U1.11 ; J15.10@61.467,28.322 J15.10
  Bottom Layer w0.6: U1.11@56.77,28.322 J15.10@61.467,28.322
R12_2: Q3.2 R12.2 | length 2.2
  Top Layer w0.8: Q3.2 74.229,39.554 74.229,41.746 R12.2
RST/P5.4: J14.7 U1.7 | length 4.9
  Top Layer w0.6: J14.7 36.456,35.948 41.331,35.948 U1.7
RTC_SCL: J15.4 U1.17 U8.1 | length 31.6
  Top Layer w0.6: U1.17 J15.4 63.036,43.561 72.275,52.8 79.8,52.8 U8.1@83.15,56.15
RTC_SDA: J15.3 U1.18 U8.2 | length 28.1
  Top Layer w0.6: U1.18 J15.3 63.176,46.101 71.425,54.35 78.925,54.35 80.59,56.015 U8.2
SW3_1: D1.1 D2.1 D3.1 SW3.1 SW3.2 SW4.1 SW4.2 SW5.1 SW5.2 | length 63.1
  Top Layer w0.6: SW4.1 11.657,5.751 SW4.2 18.251,8.05 29.775,8.05 SW5.2 34.157,10.225 ; 11.657,5.95 D3.1 ; SW3.2 SW3.1 29.725,18.127 29.725,13.113 ; D2.1 26.905,13.113 29.725,13.113 ; SW5.1 34.157,10.225 ; 29.725,13.113 34.145,13.113 D1.1 34.157,10.225
T: J5.2 J15.9 U1.12 U2.7 U7.1 | length 75.5
  Top Layer w0.3: U7.1 15.764,30.936 15.8,30.9
  Top Layer w0.4: 15.8,30.9 15.9,30.8 22.4,30.8 28.8,24.4 44,24.4 50.463,30.863 U1.12
  Top Layer w0.5: U2.7 51.649,14.238 50.862,14.238 49.3,15.8 49.3,20.97 50.07,21.74 J5.2 55.07,26.8 57.5,26.8 58.3,27.6 58.3,30.8 ; U1.12 U1.12@56.77,30.862 ; J15.9 J15.9
  Top Layer w0.6: U1.12@56.77,30.862 58.3,30.862 J15.9
U2_8: C6.1 U2.8 | length 2.4
  Top Layer w0.5: U2.8 51.677,15.48 53.52,15.48 C6.1
U6_1: R11.1 U6.1 | length 9.8
  Top Layer w0.6: R11.1 17.866,61.966 19.2,63.3 22.3,63.3 23.519,62.081 U6.1@23.602,62.081
U6_4: R10.1 U6.4 | length 8.2
  Top Layer w0.6: R10.1 20.029,49.629 21.082,50.682 U6.4
U7_2: LED4.2 R5.2 U7.2 | length 10.1
  Top Layer w0.3: R5.2 13.603,29.753 13.603,30.097 12.465,31.235 12.465,31.73 LED4.2 12.065,33.224 12.241,33.4 16.088,33.4 16.264,33.224 U7.2
U7_3: LED4.1 R6.1 U7.3 | length 12.9
  Top Layer w0.3: R6.1 11.782,29.747 11.782,30.218 10.865,31.135 10.865,31.73 LED4.1 10.465,33.365 11.1,34 16.4,34 16.764,33.636 U7.3
U7_7: LED5.2 R8.1 U7.7 | length 12.4
  Top Layer w0.3: 17.2,41.8 17.264,41.736 U7.7
  Top Layer w0.4: R8.1 13.158,41.524 13.525,41.891 13.647,41.891 14.156,42.4 16.6,42.4 17.2,41.8
  Top Layer w0.6: R8.1 13.162,41.399 13.162,39.246 LED5.2
U7_8: LED4.3 R7.1 U7.8 | length 12.1
  Top Layer w0.3: LED4.3 LED4.3@13.735,32.2 ; 16.7,38.8 16.764,38.736 U7.8
  Top Layer w0.4: R7.1 16.461,39.039 16.7,38.8
  Top Layer w0.6: LED4.3@13.735,32.2 v1(14.7,32.2) ; v1(15,37.9) 15,38.772 15.266,39.039 R7.1
  Bottom Layer w0.3: v1(14.7,32.2) 15,32.5 v1(15,37.9)
VCC: C10.2 J5.1 J10.2 J13.1 J14.8 LED2.1 LED6.2 MPU6050.1 OLED1.2 OLED2.2 Q3.1 R5.1 R6.2 R7.2 R8.2 R.1 R.2 SW7.4 U1.8 U3.3 U6.6 U7.10 U8.3 | length 300.7
  Top Layer w0.3: U7.10 v2@15.764,37.7
  Top Layer w0.5: R6.2 10.576,29.021 10.576,28.224 11,27.8 15.2,27.8 15.636,28.236 15.636,29.021 R5.1 v1(16.747,29.337)
  Top Layer w0.8: LED6.2@9.543,51.669 9.842,51.969 9.842,56.197 J13.1 ; v1(11.3,42.2) 13.1,44 21.6,44 23.6,46 U6.6@23.6,55.113 ; U6.6@23.6,55.437 23.6,56.631 23.131,57.1 19.4,57.1 18.688,56.388 J13.1 ; J14.8 36.456,33.408 41.331,33.408 U1.8 ; OLED2.2 42.921,88.226 46.74,92.045 OLED1.2 46.74,93.431 46.271,93.9 C10.2 18.7,93.9 9.73,84.93 J10.2 9.73,78.53 7.196,75.996 7.196,56.857 7.665,56.388 J13.1 ; J5.1 52.61,19.226 54.536,17.3 59.1,17.3 63.071,13.329 SW7.4 67.945,6.945 71.031,10.031 U3.3 71.028,11.955 71.028,13.772 67.9,16.9 67.9,21.248 68.369,21.717 LED2.1 70.162,39.55 ; Q3.1 70.163,39.55 ; U8.3 78.05,57.9 78.75,58.6 84.95,58.6 R.1@86.233,57.317 ; R.2 86.216,54.992 86.216,50.943 MPU6050.1 86.233,48.158 83.375,45.3 74.4,45.3 70.162,41.062 70.162,39.55
  Bottom Layer w0.5: v1(15.9,40.575) 15.881,40.556 15.881,40.099 15.8,40.019 v2(15.8,37.7) 15.8,36.364 16.747,35.417 v1(16.747,29.337)
  Bottom Layer w0.6: v1@11.327,42.197 14.278,42.197 v1(15.9,40.575)
  Bottom Layer w0.8: v1(15.9,40.575) 25.05,40.575 32.224,33.401 J14.8 ; U1.8 44.21,33.415 47.1,30.525 47.1,30.45 52.61,24.94 J5.1
VIN: C1.1 C7.2 J1.1 SW7.6 U2.5 USB1.1 | length 49.3
  Top Layer w0.4: USB1.1 47.595,5.3 ; 49.6,1.8 47.9,3.5 ; 47.595,5.3 47.595,3.405 49.3,1.7 49.7,1.7 47.9,3.5 ; 47.595,5.3 47.666,5.3 47.9,5.066 47.9,3.5
  Top Layer w0.6: 49.6,1.8 53,1.8 ; C7.2 51.6,9.3 51.975,8.925 51.975,8.151 52.326,7.8 53.2,7.8 54,7 ; C7.2@51.616,9.346 51.616,11.671 51.629,11.684 U2.5 ; C1.1 57.849,10.849 54,7 ; SW7.6 61.751,0.625 54.175,0.625 53,1.8 ; 53,1.8 54,2.8 54,7
  Top Layer w0.8: C7.2 C7.2@51.616,9.346 ; SW7.6 65.138,1.945 65.559,1.524 J1.1
pads on no net: OLED2. U2.4 U4.17 U4.18 USB1.6 USB1.7 USB1.8 USB1.9

## Polygon pours and split planes (outlines as drawn)
LGND on Top Layer "NONET_L-01_P-001" (solid, remove dead copper, pour order 1): 6.5,54.7
GND on Bottom Layer "NONET_L-01_P-001" (solid, remove dead copper, pour order 3): 0,98 0,0 98,0 98,98
BGND on Bottom Layer "NONET_L-01_P-001" (solid, remove dead copper, pour order 0): 43.9,16.4 43.9,1.5 52.8,1.5 54,0.3 72.2,0.3 72.2,2.1 70.8,3.5 66,3.5 64.5,5 64.5,8 63.1,9.4 62.4,9.4 55.4,16.4

## Keep-outs
Keep-Out Layer:
  the board outline again, w0.2

## Other copper
Top Layer:
  rectangle net LGND: 6.8,47.8 9.5,50.5
Bottom Layer:
  rectangle net LGND: 6.5,44.7 11.4,53.3

## Silkscreen, mask and mechanical layers (free items; w line width, h text height)
Top Overlay:
  lines w0.2: 29.517,47.5 37.717,47.5 ; 29.517,49.9 37.717,49.9 ; 29.583,29.6 37.717,29.6 ; 29.583,32.1 37.717,32.1 ; 29.583,34.7 37.717,34.7 ; 29.583,37.2 37.717,37.2 ; 29.583,42.3 37.717,42.3 ; 29.583,44.8 37.717,44.8 ; 29.585,39.751 37.719,39.751 ; 35.179,27.051 29.568,27.051 29.517,27.051 29.517,52.451 35.179,52.451 ; 60.198,39.751 68.332,39.751 ; 60.2,29.6 68.334,29.6 ; 60.2,32.1 68.334,32.1 ; 60.2,34.7 68.334,34.7 ; 60.2,37.2 68.334,37.2 ; 60.2,42.3 68.334,42.3 ; 60.2,44.8 68.334,44.8 ; 60.2,47.5 68.4,47.5 ; 60.2,49.9 68.4,49.9 ; 62.738,27.051 68.349,27.051 68.4,27.051 68.4,52.451 62.738,52.451
  text "P1.2" at 30.386,50.4 h2.4
  text "P1.1" at 63.3,50.4 h2.4
  text "P1.3" at 30.253,47.829 h2.4
  text "P1.0" at 63.3,47.829 h2.4
  text "P3.7" at 63.3,45.329 h2.4
  text "P1.4" at 30.186,45.3 h2.4
  text "P1.5" at 30.244,42.729 h2.4
  text "P3.6" at 63.3,42.729 h2.4
  text "P1.6" at 30.239,40.229 h2.4
  text "P3.5" at 63.3,40.229 h2.4
  text "P3.4" at 63.3,37.729 h2.4
  text "P1.7" at 30.279,37.7 h2.4
  text "P3.3" at 63.3,35.229 h2.4
  text "P5.4" at 29.794,35.121 h1.8 r15
  text "rst" at 32.894,34.823 h2 r15
  text "VCC" at 30.255,32.629 h2.4
  text "P3.2" at 63.3,32.629 h2.4
  text "P3.1" at 63.3,30.129 h2.4
  text "P5.5" at 29.794,30.021 h1.8 r15
  text "vref" at 32.394,29.721 h1.8 r15
  text "GND" at 30.253,27.629 h2.4
  text "P3.0" at 63.3,27.629 h2.4
  text "BAT" at 72.4,0.9 h2

## Text inside footprints (layer, text, board x,y; h text height)
A44: Top Overlay "3.3V" at 63.575,18.875 h2; Top Overlay "GND" at 63.55,21.4 h2
BUZZER1: Top Overlay "+" at 82.215,37.27 h1.27 r315
OLED1: Top Overlay "IIC-Connector" at 41.148,64.417 h1.2
OLED2: Top Overlay "0.96'OLED" at 42.917,81.774 h1.2; Top Overlay "4SPI-Connector" at 40.25,65.899 h1.2
U8: Top Overlay "RTC DS3231 +" at 80.006,68.824 h2.03 r90; Top Overlay "GND" at 75.942,57.902 h1.2 r90; Top Overlay "VCC" at 78.609,57.902 h1.2 r90; Top Overlay "SDA" at 81.149,57.902 h1.2 r90; Top Overlay "SCL" at 83.816,58.029 h1.2 r90